# Altium PCB SWRmeter.PcbDoc
Units mm, origin at the board's own origin, x right, y up, seen from the top; angles counter-clockwise.
Board outline 60 x 60 mm, 2 copper layers (Top Layer, Bottom Layer); 17 components, 11 nets, 50 pads, 0 vias.
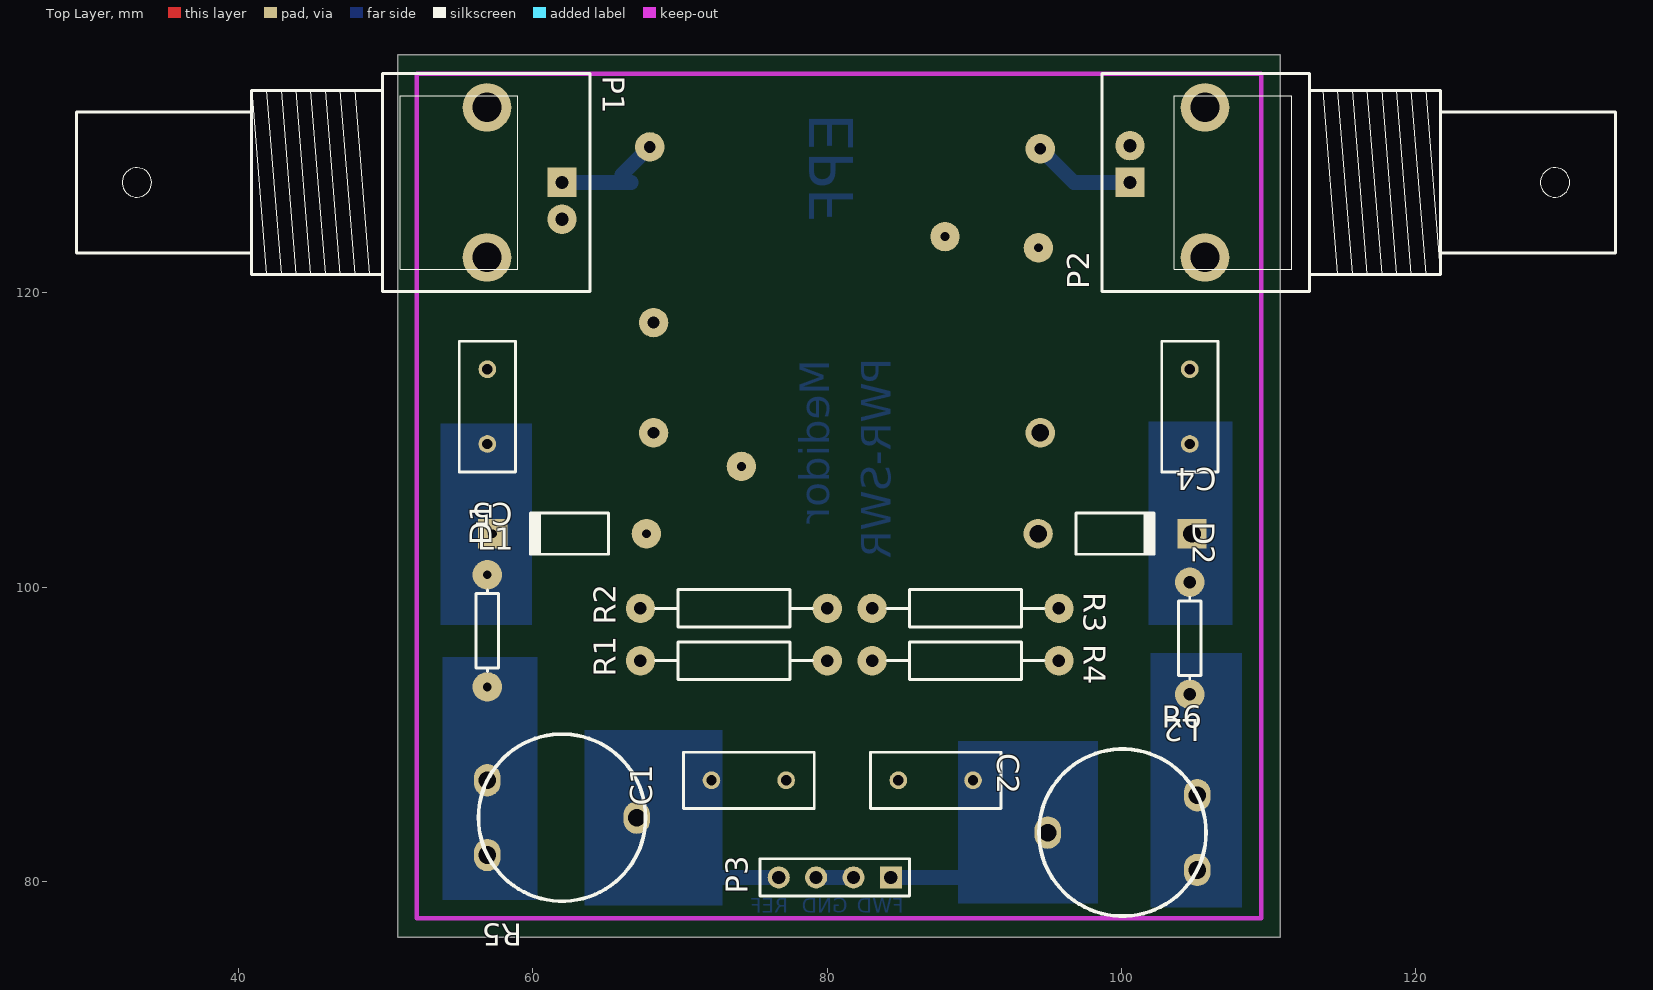
[diagram p0: Top Layer view]
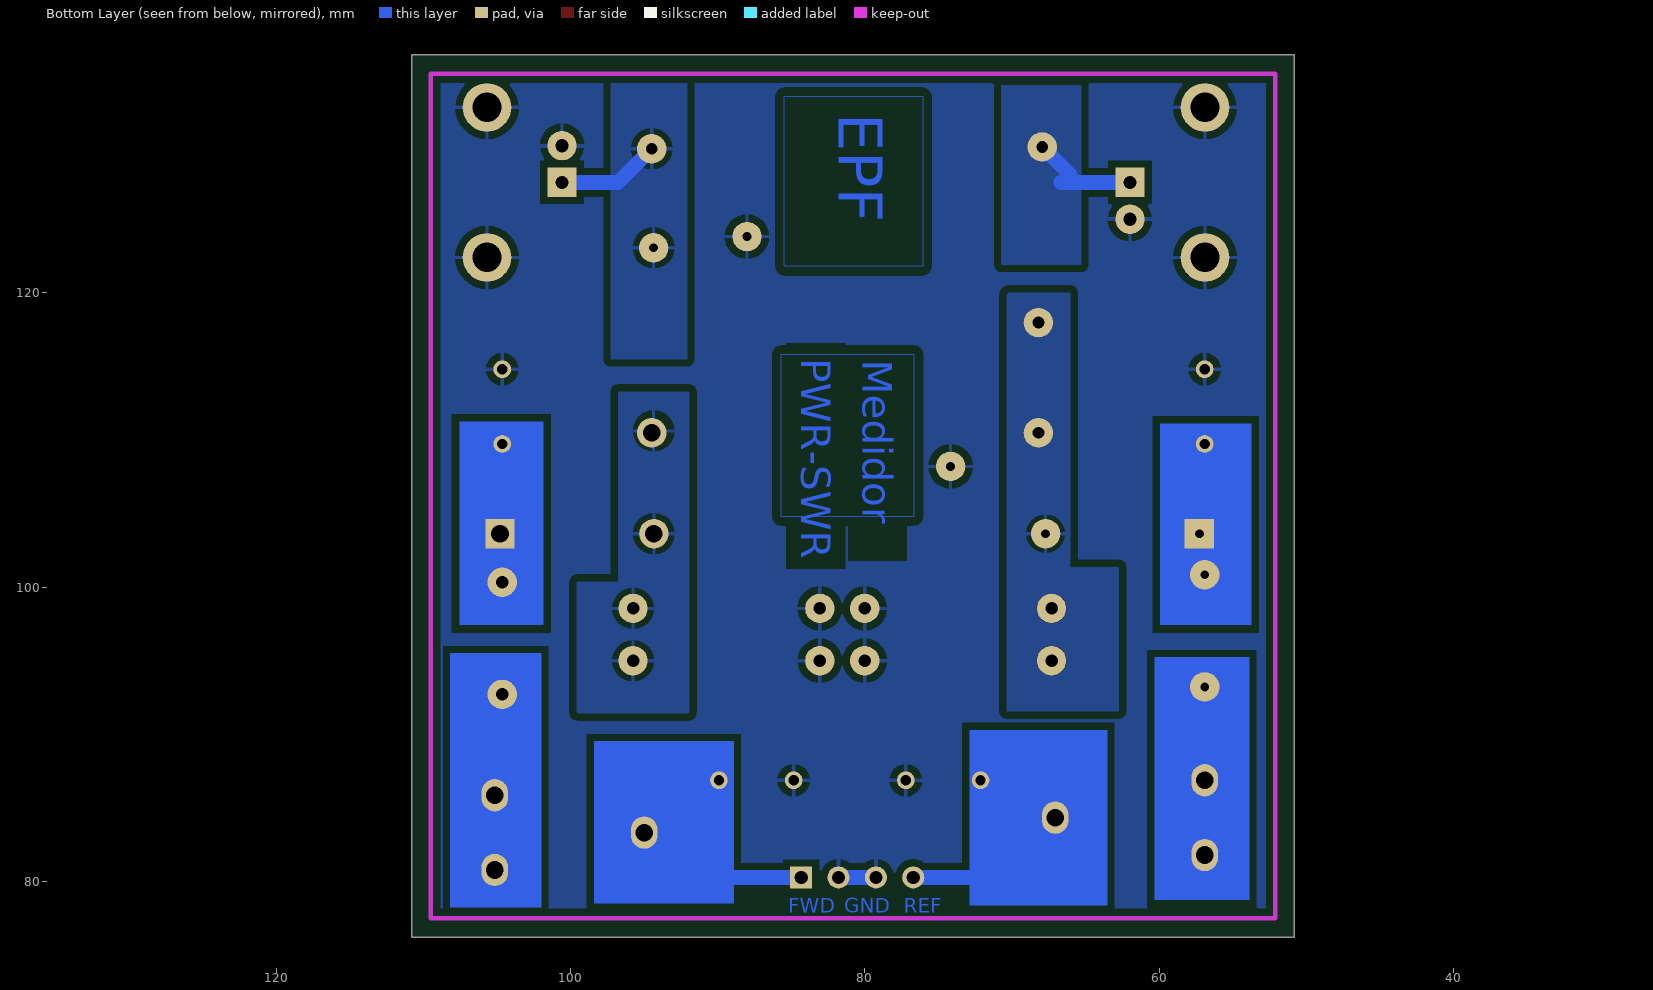
[diagram p1: Bottom Layer view, seen from below]

## Layer stack, top to bottom
Top Layer: signal copper 0.0356
Dielectric: dielectric 0.32, FR-4, Dk 4.8
Bottom Layer: signal copper 0.0356

## Board outline
50.8,76.2 110.8,76.2 110.8,136.2 50.8,136.2

## Design rules (kind name [scope] priority, off if disabled: settings)
Clearance [All] p1: gap=0.5
ComponentClearance [All] p1: gap=0.254 collisioncheckmode=3 verticalgap=0.254
HoleSize [All] p1: absolutevalues=TRUE maxlimit=2.54 minlimit=0.7 maxpercent=80.000 minpercent=20.000
PolygonConnect [All] p1: connectstyle=Relief reliefconductorwidth=0.254 reliefentries=4 polygonreliefangle="90 Angle"
RoomDefinition SWR [InComponentClass('SWR')] p1: confinementstyle=ConfineIn formatcopy=TRUE lockcomponents=FALSE outline 50.8,76.2 110.744,76.2 110.744,136.144 50.8,136.144
RoutingVias [All] p1: holewidth=0.8 width=2 viastyle="Through Hole" minholewidth=0.711 minwidth=1.7 maxholewidth=1 maxwidth=2.27
SolderMaskExpansion [All] p1: expansion=0.102
TestPointUsage [All] p1: valid=0 allowmultiple=FALSE
Testpoint [All] p1: side=15 testpointundercomponent=TRUE minsize=1.016 maxsize=2.54 preferedsize=1.524 minholesize=0 maxholesize=1.016 preferedholesize=0.813 testpointgrid=0.025 style=1023 order=0-112345678
Width [All] p1: maxlimit=2 minlimit=0.3 preferedwidth=1
16 further rules are at their usual default settings.

## Components (designator, comment, footprint, x,y, rotation, side; value= is the part's Value field where it differs from the comment)
C1 "Cap" RAD-0.2 74.676,86.868 r180 top
C2 "Cap" RAD-0.2 87.376,86.868 r0 top
C4 "Cap" RAD-0.2 104.648,112.268 r270 top
C5 "Cap" RAD-0.2 56.896,112.268 r270 top
D1 "Diode 1N914" DIO10.46-5.3x2.8#1 62.484,103.632 r180 top
D2 "Diode 1N914" DIO10.46-5.3x2.8#2 99.568,103.632 r0 top
L1 "Inductor Iron" AXIAL-0.3#1 56.896,97.028 r90 top
L2 "Inductor Iron" AXIAL-0.3#2 104.648,96.52 r270 top
P1 "BNC" "BNC_RA CON" 61.976,127.508 r0 top
P2 "BNC" "BNC_RA CON" 100.584,127.508 r180 top
P3 "Header 4" HDR1X4 84.328,80.264 r180 top
R1 "Res Semi" AXIAL-0.5 73.66,94.996 r180 top
R2 "Res Semi" AXIAL-0.5 73.66,98.552 r180 top
R3 "Res Semi" AXIAL-0.5 89.408,98.552 r0 top
R4 "Res Semi" AXIAL-0.5 89.408,94.996 r0 top
R5 "RPot" Potenciometro 56.896,84.328 r270 top
R6 "RPot" Potenciometro 105.156,83.312 r90 top

## Footprints (in the part's own frame and the unit in brackets; to place one, negate y for a bottom-side part, rotate by r counter-clockwise, add the part's x,y. Pads: shape width x height; smd on the part's side, far side on the other; paste and mask are expansions set on the pad)
AXIAL-0.3#1 [mm] "Resistor; 2 Leads"
  round 2 hole 0.6: 1(-3.81,0) 2(3.81,0)
  silkscreen extent -2.77,-0.76 2.77,0.76
AXIAL-0.3#2 [mm] "Resistor; 2 Leads"
  round 2 hole 0.85: 1(-3.81,0) 2(3.81,0)
  silkscreen extent -2.77,-0.76 2.77,0.76
AXIAL-0.5 [mm] "Semiconductor Resistor; 2 Leads"
  round 2 hole 0.85: 1(-6.35,0) 2(6.35,0)
  silkscreen extent -5.33,-1.27 5.33,1.27
"BNC_RA CON" [mm] "Connector; BNC Elbow"
  rect 2x2 hole 0.9: 1(0,0)
  round 3.3 hole 2: 2(-5.1,-5.1) 2(-5.1,5.1)
  round 2 hole 0.9: 2(0,-2.5)
  silkscreen extent -33,-7.4 1.9,7.4
DIO10.46-5.3x2.8#1 [mm] "Diode, Axial; Body 5.2 x 2.7 mm (LxDia. max), Lead Dia. 0.86 mm (max)"
  round 2 hole 0.6: 1(-5.23,0)
  rect 2x2 hole 0.6: 2(5.23,0)
  silkscreen extent -2.65,-1.4 2.75,1.4
DIO10.46-5.3x2.8#2 [mm] "Diode, Axial; Body 5.2 x 2.7 mm (LxDia. max), Lead Dia. 0.86 mm (max)"
  round 2 hole 1.2: 1(-5.23,0)
  rect 2x2 hole 1.2: 2(5.23,0)
  silkscreen extent -2.65,-1.4 2.75,1.4
HDR1X4 [mm] "Connector; Header; 4 Position"
  rect 1.5x1.5 hole 0.9: 1(0,0)
  round 1.5 hole 0.9: 2(2.54,0) 3(5.08,0) 4(7.62,0)
  silkscreen extent -1.27,-1.27 8.89,1.27
Potenciometro [mm]
  oval 2.2x1.8 hole 1.2: 1(-2.54,0) 2(0,10.16) 3(2.54,0)
  silkscreen extent -5.68,-0.6 5.68,10.76
RAD-0.2 [mm] "Jumper Wire; 2 Leads"
  round 1.2 hole 0.7: 1(-2.54,0) 2(2.54,0)
  silkscreen extent -4.44,-1.91 4.44,1.91

## Part data
C1 C5: "Capacitor"
C2 C4: library part Cap2, "Capacitor"
D1 D2: "High Conductance Fast Diode"
L1 L2: "Magnetic-Core Inductor"
P1 P2: "BNC Elbow Connector"
P3: "Header, 4-Pin"
R1 R2 R3 R4: "Semiconductor Resistor"
R5 R6: "Potentiometer"

## Free pads (board coordinates)
  round 2 hole 0.8: 0(94.488,129.794) 1(67.945,129.921) 2(68.199,117.983) 9(68.199,110.49)
  round 2 hole 0.6: 3(88.011,123.825) 7(94.361,123.063) 10(74.168,108.204)
  round 2 hole 1.2: 8(94.488,110.49)

## Nets (pads, with @x,y where several pads share a name; then routed paths per layer and width w, separated by ;. In a path a pad name is that pad's centre, name@x,y a point inside that pad or via, vN(x,y) a via of type N, cw(c..) or ccw(c..) an arc to the next point about the centre after c; other vN are vias at no path point)
GND: C1.1 C2.1 C4.1 C5.1 P1.2 P2.2 P3.2 P3.3 pad.3 pad.10 R1.1 R2.1 R3.1 R4.1 | length 2.5
  Bottom Layer w1: P3.3 P3.2
NetC1_2: C1.2 P3.4 R5.2 | length 11.3
  Bottom Layer w1: R5.2 71.12,80.264 P3.4
NetC2_2: C2.2 P3.1 R6.2 | length 11.9
  Bottom Layer w1: P3.1 91.948,80.264 R6.2
NetC4_2: C4.2 D2.2 L2.1
NetC5_2: C5.2 D1.2 L1.2
NetD1_1: D1.1 pad.2 pad.9 R1.2 R2.2
NetD2_1: D2.1 pad.8 R3.2 R4.2
NetL1_1: L1.1 R5.1 R5.3
NetL2_2: L2.2 R6.1 R6.3
NetP1_1: P1.1 pad.1 | length 7.4
  Bottom Layer w1: P1.1 66.675,127.508 ; 66.04,128.016 pad.1
NetP2_1: P2.1 pad.0 pad.7 | length 7
  Bottom Layer w1: pad.0 96.774,127.508 P2.1

## Polygon pours and split planes (outlines as drawn)
NetD1_1 on Bottom Layer (solid): 70.358,119.888 70.358,91.567 62.738,91.567 62.738,101.346 66.04,101.346 66.04,120.015 70.231,120.015
NetD2_1 on Bottom Layer (solid): 91.948,113.175 91.948,91.44 99.568,91.44 99.568,100.351 96.774,100.351 96.774,113.284 91.821,113.284
NetP2_1 on Bottom Layer (solid): 92.087,115.316 92.087,134.239 97.282,134.239 97.282,115.49 91.821,115.49
NetP1_1 on Bottom Layer (solid): 70.739,121.92 65.278,121.92 65.278,134.112 70.739,134.112
no net on Bottom Layer (none): 76.073,133.35 76.073,121.793 85.471,121.793 85.471,133.35
no net on Bottom Layer (none): 76.658,115.558 76.658,104.775 85.675,104.775 85.675,115.824 76.658,115.824
GND on Bottom Layer (solid, remove dead copper): 51.435,135.509 51.435,76.708 110.236,76.708 110.236,135.382

## Keep-outs
Keep-Out Layer:
  lines w0.3: 52.1,77.5 109.5,77.5 109.5,134.9 52.1,134.9 52.1,77.5

## Other copper
Bottom Layer:
  rectangle net NetC5_2: 53.721,97.409 59.944,111.125
  rectangle net NetC4_2: 101.854,97.409 107.569,111.252
  rectangle net NetL1_1: 53.848,78.74 60.325,95.25
  rectangle net NetC1_2: 63.5,78.359 72.898,90.297
  rectangle net NetC2_2: 88.9,78.486 98.425,89.535
  rectangle net NetL2_2: 101.981,78.232 108.204,95.504
  text "EPF" at 81.788,132.207 h3 r90
  text "PWR-SWR" at 84.328,115.57 h2 r90
  text "Medidor" at 80.137,115.443 h2 r90
  text "REF" at 77.343,77.851 h1
  text "GND" at 81.407,77.851 h1
  text "FWD" at 85.217,77.851 h1

## Silkscreen, mask and mechanical layers (free items; w line width, h text height)
Drill Drawing:
  text ".LEGEND" at 115.88,81.28 h1.52
  text "Drill Drawing." at 115.88,78.74 h1.52

## Dimensions
52.1,77.5 to 109.5,77.5 on Mechanical 1
52.1,77.5 to 52.1,134.9 on Mechanical 1